# EAGLE board ADE9000 Shield (EAGLE 9.6.2)
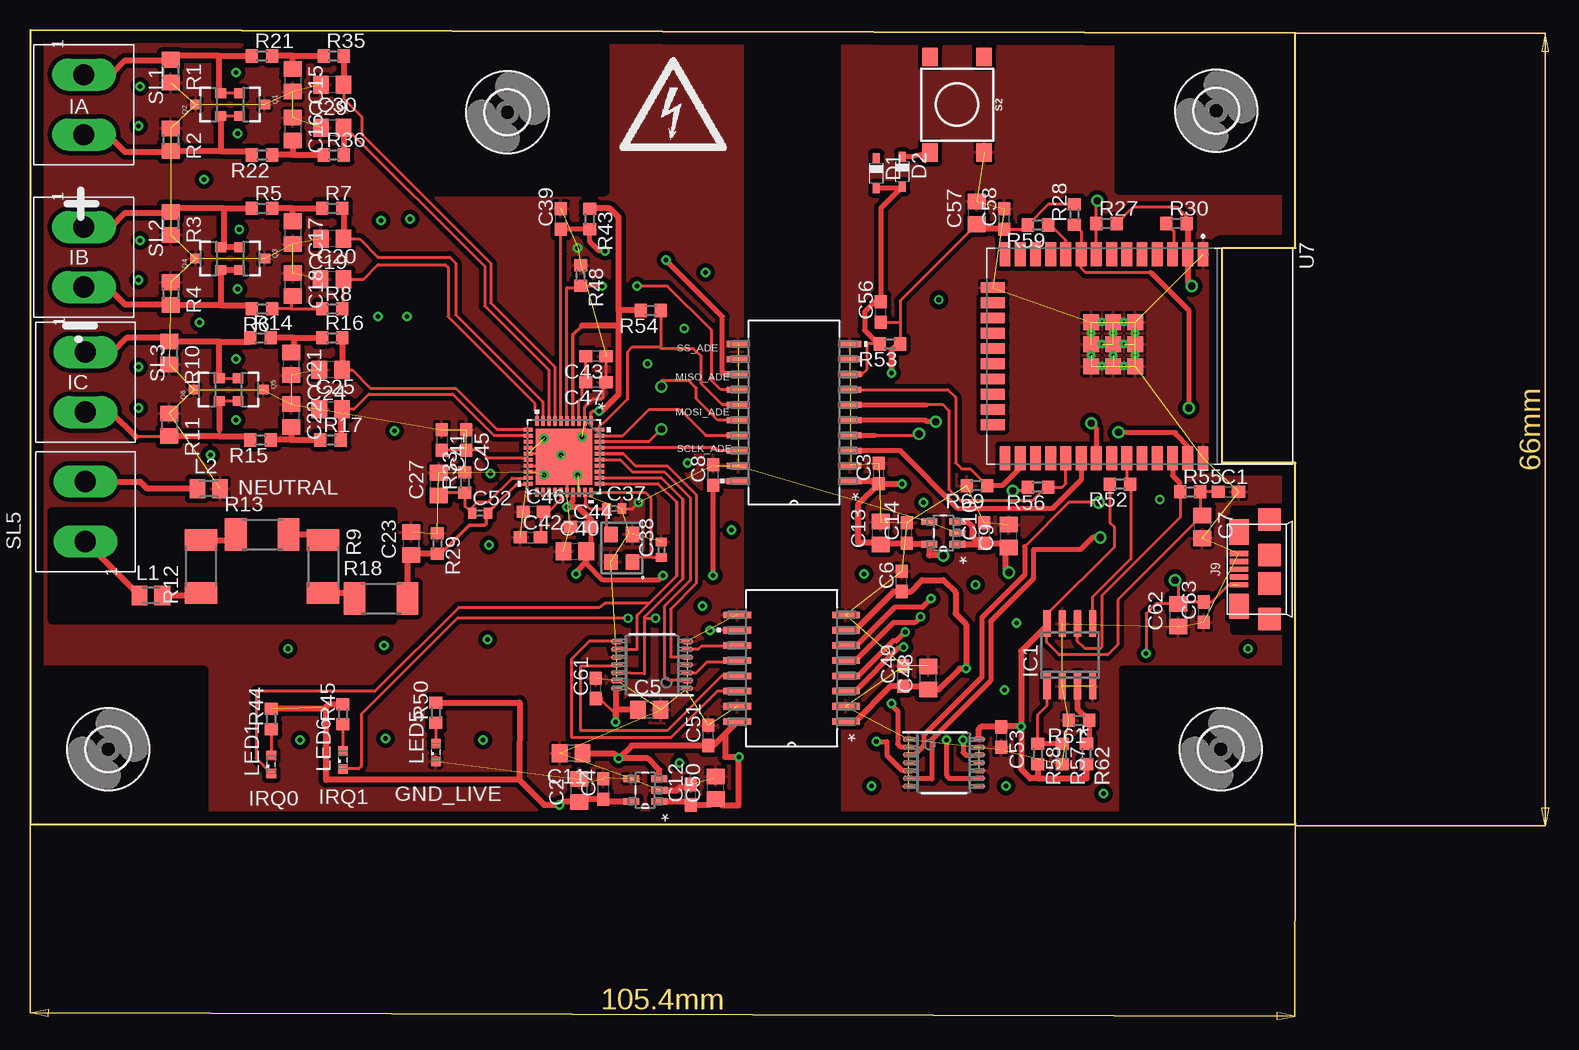
[diagram p0: board, top side]
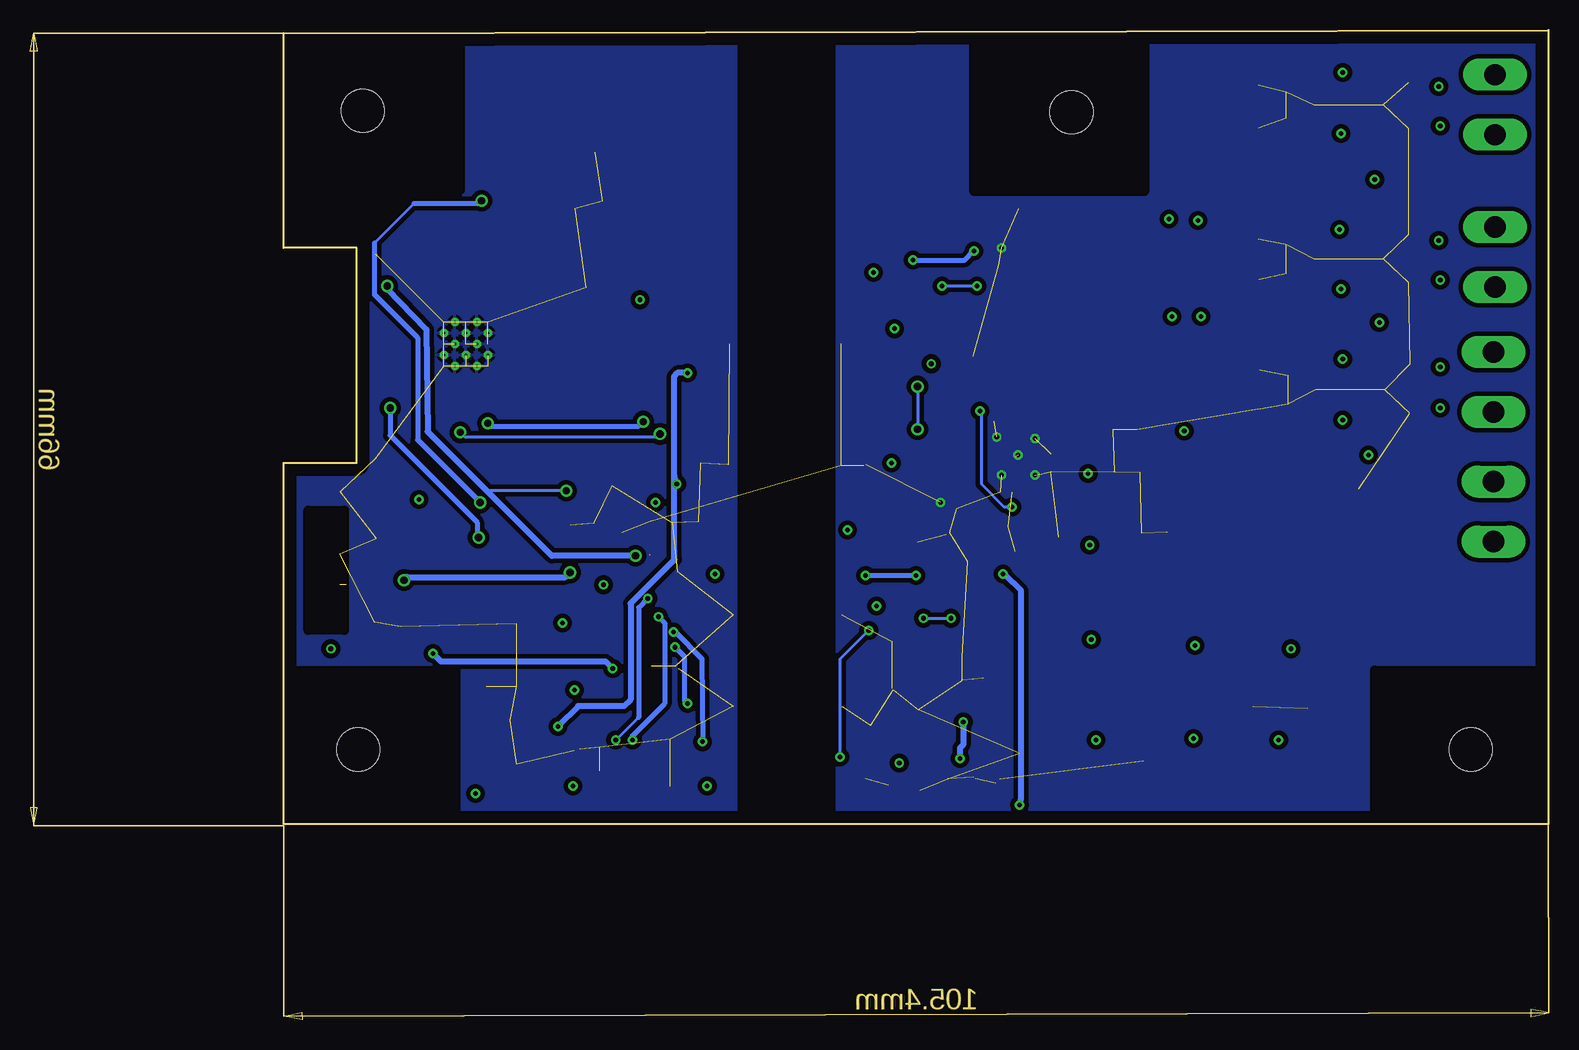
[diagram p1: board, bottom side, seen from below]

Size 105.41 x 66.17 mm. Coordinates in mm from the lower left corner, seen from the top.
Outline: 0,0 105.41,0 105.41,30.1 99.31,30.1 99.31,48.01 105.41,48.01 105.41,65.91 0,66.17 0,0
Copper layers (1*16): Top 0.035mm / dielectric 1.5mm / Bottom 0.035mm
Design rules "default": minimum track width 10mil, minimum drill 24mil, track to track 8mil, track to pad 8mil, pad to pad 8mil, via to via 8mil, smd to smd 8mil, copper to edge 40mil, drill to drill 8mil, minimum pad ring 10mil, minimum via ring 8mil, stop-mask expansion 4mil, vias tented up to drill 0mil, thermal gap 10mil
tRestrict: area 1.8,17 to 30.2,26; area 0.3,0.1 to 14.5,12.8; area 91.1,0.1 to 105.3,12.8; area 90.7,52.8 to 104.9,65.5; area 33.7,52.7 to 47.9,65.4; area 100.3,16.1 to 103.4,26.2; area 59.8,-0.1 to 67.2,66
bRestrict: area 0.3,0.1 to 14.5,12.8; area 91.1,0.1 to 105.3,12.8; area 90.7,52.8 to 104.9,65.5; area 33.7,52.7 to 47.9,65.4; area 100.3,16.1 to 103.4,26.2; area 59.8,-0.1 to 67.2,66

## Footprints (pad centres in the part's own frame; a part is rotated, then mirrored left to right if it is on the bottom)
C0603 = smd 1.1 x 1: 1 -0.85,0; 2 0.85,0
C0805 = smd 1.3 x 1.5: 1 -0.95,0; 2 0.95,0
C0402 = smd 0.7 x 0.9: 1 -0.65,0; 2 0.65,0
SOD323_ST = smd 0.8 x 0.6: A 1.25,0; C -1.25,0
3,6 = hole 3.6: 0,0
SO-08 = smd 0.6 x 2.2: 1 -1.905,-2.6; 2 -0.635,-2.6; 3 0.635,-2.6; 4 1.905,-2.6; 5 1.905,2.6; 6 0.635,2.6; 7 -0.635,2.6; 8 -1.905,2.6
USB-MICRO-10103594 = smd 0.4 x 1.6: D+ 0,0; D- -0.65,0; GND 1.3,0; ID 0.65,0; VBUS -1.3,0 | smd 1.9 x 1.9: SHLD1 -1.2,-2.55; SHLD2 1.2,-2.55; SHLD3 -4.15,-2.55; SHLD4 4.15,-2.55 | smd 2.1 x 1.6: SHLD5 3.1,0; SHLD6 -3.1,0
M0805 = smd 1.3 x 1.6: 1 -0.95,0; 2 0.95,0
SML0603 = smd 0.8 x 0.8: A 0.75,0; C -0.75,0
SOT23-3 = smd 0.8 x 0.9: 1 -0.95,-1; 2 0.95,-1; 3 0,1.1
SMD_4PIN_3.2X2.1 = smd 1.3 x 1.1: 1 -1.15,-0.9; 2 1.15,-0.9; 3 1.15,0.9; 4 -1.15,0.9
R0805 = smd 1.3 x 1.5: 1 -0.95,0; 2 0.95,0
R0603 = smd 1 x 1.1: 1 -0.85,0; 2 0.85,0
R2010 = smd 1.8 x 2.7: 1 -2.2,0; 2 2.2,0
TACTILE_SWITCH_SMD_6.2MM_TALL = smd 1.55 x 1.3: A1 -3.975,-2.25; A2 3.975,-2.25; B1 -3.975,2.25; B2 3.975,2.25
02P = drill 1.778 long: 1 -2.5,0; 2 2.5,0
CP_40_7 = smd 0.762 x 0.305: 1 -2.972,2.25; 2 -2.972,1.75; 3 -2.972,1.25; 4 -2.972,0.75; 5 -2.972,0.25; 6 -2.972,-0.25; 7 -2.972,-0.75; 8 -2.972,-1.25; 9 -2.972,-1.75; 10 -2.972,-2.25; 21 2.972,-2.25; 22 2.972,-1.75; 23 2.972,-1.25; 24 2.972,-0.75; 25 2.972,-0.25; 26 2.972,0.25; 27 2.972,0.75; 28 2.972,1.25; 29 2.972,1.75; 30 2.972,2.25 | smd 0.305 x 0.762: 11 -2.25,-2.972; 12 -1.75,-2.972; 13 -1.25,-2.972; 14 -0.75,-2.972; 15 -0.25,-2.972; 16 0.25,-2.972; 17 0.75,-2.972; 18 1.25,-2.972; 19 1.75,-2.972; 20 2.25,-2.972; 31 2.25,2.972; 32 1.75,2.972; 33 1.25,2.972; 34 0.75,2.972; 35 0.25,2.972; 36 -0.25,2.972; 37 -0.75,2.972; 38 -1.25,2.972; 39 -1.75,2.972; 40 -2.25,2.972 | smd 4.699 x 4.699: 41 0,0
RI_16_1 = smd 2.306 x 0.561: 1 -4.527,4.445; 2 -4.527,3.175; 3 -4.527,1.905; 4 -4.527,0.635; 5 -4.527,-0.635; 6 -4.527,-1.905; 7 -4.527,-3.175; 8 -4.527,-4.445; 9 4.527,-4.445; 10 4.527,-3.175; 11 4.527,-1.905; 12 4.527,-0.635; 13 4.527,0.635; 14 4.527,1.905; 15 4.527,3.175; 16 4.527,4.445
PW0014A_N = smd 0.95 x 0.45: 1 -2.95,1.95; 2 -2.95,1.3; 3 -2.95,0.65; 4 -2.95,0; 5 -2.95,-0.65; 6 -2.95,-1.3; 7 -2.95,-1.95; 8 2.95,-1.95; 9 2.95,-1.3; 10 2.95,-0.65; 11 2.95,0; 12 2.95,0.65; 13 2.95,1.3; 14 2.95,1.95
UJ_5 = smd 1.321 x 0.559: 1 -1.168,0.95; 2 -1.168,0; 3 -1.168,-0.95; 4 1.168,-0.95; 5 1.168,0.95
RI_20_1 = smd 1.921 x 0.511: 1 -4.65,5.715; 2 -4.65,4.445; 3 -4.65,3.175; 4 -4.65,1.905; 5 -4.65,0.635; 6 -4.65,-0.635; 7 -4.65,-1.905; 8 -4.65,-3.175; 9 -4.65,-4.445; 10 -4.65,-5.715; 11 4.65,-5.715; 12 4.65,-4.445; 13 4.65,-3.175; 14 4.65,-1.905; 15 4.65,-0.635; 16 4.65,0.635; 17 4.65,1.905; 18 4.65,3.175; 19 4.65,4.445; 20 4.65,5.715
MODULE_ESP32-WROOM-32 = smd 2 x 0.9: 1 -8.5,5.26; 2 -8.5,3.99; 3 -8.5,2.72; 4 -8.5,1.45; 5 -8.5,0.18; 6 -8.5,-1.09; 7 -8.5,-2.36; 8 -8.5,-3.63; 9 -8.5,-4.9; 10 -8.5,-6.17; 11 -8.5,-7.44; 12 -8.5,-8.71; 13 -8.5,-9.98; 14 -8.5,-11.25; 25 8.5,-11.25; 26 8.5,-9.98; 27 8.5,-8.71; 28 8.5,-7.44; 29 8.5,-6.17; 30 8.5,-4.9; 31 8.5,-3.63; 32 8.5,-2.36; 33 8.5,-1.09; 34 8.5,0.18; 35 8.5,1.45; 36 8.5,2.72; 37 8.5,3.99; 38 8.5,5.26 | smd 0.9 x 2: 15 -5.715,-12.25; 16 -4.445,-12.25; 17 -3.175,-12.25; 18 -1.905,-12.25; 19 -0.635,-12.25; 20 0.635,-12.25; 21 1.905,-12.25; 22 3.175,-12.25; 23 4.445,-12.25; 24 5.715,-12.25 | smd 1.33 x 1.33: 39_1 -2.835,-0.405; 39_2 -1,-0.405; 39_3 0.835,-0.405; 39_4 -2.835,-2.24; 39_5 -1,-2.24; 39_6 0.835,-2.24; 39_7 -2.835,-4.075; 39_8 -1,-4.075; 39_9 0.835,-4.075 | drill 0.2 pad 0.3: 39_10 -1.917,-0.405; 39_11 -0.083,-0.405; 39_12 -2.835,-1.323; 39_13 -1,-1.323; 39_14 0.835,-1.323; 39_15 -1.917,-2.24; 39_16 -0.083,-2.24; 39_17 -2.835,-3.158; 39_18 -1,-3.158; 39_19 0.835,-3.158; 39_20 -1.917,-4.075; 39_21 -0.083,-4.075

## Placement (x,y rotation side)
C1  0.1u  [C0603]  99.82,27.69 0 top
C2  10u  [C0805]  45.72,2.79 90 top
C3  0.1u  [C0603]  70.69,29.21 90 top
C4  0.1u  [C0603]  47.75,2.92 90 top
C5  4.7u  [C0805]  51.56,9.52 0 top
C6  0.1u  [C0603]  72.59,20.22 90 top
C7  4.7u  [C0805]  97.66,24.77 270 top
C8  0.1u  [C0603]  56.9,29.08 90 top
C9  10u  [C0805]  81.53,24 90 top
C10  0.1u  [C0603]  79.5,24.26 90 top
C11  10u  [C0805]  45.06,5.89 180 top
C12  0.1u  [C0603]  55.02,2.44 90 top
C13  10u  [C0805]  70.87,24.26 90 top
C14  0.1u  [C0603]  73.03,24.26 90 top
C15  DNP  [C0805]  21.84,61.98 270 top
C16  DNP  [C0805]  21.84,57.91 270 top
C17  DNP  [C0805]  21.84,49.28 270 top
C18  DNP  [C0805]  21.84,44.96 270 top
C19  0.022u  [C0805]  25.15,48.77 180 top
C20  0.022u  [C0805]  25.12,45.42 0 top
C21  DNP  [C0805]  21.72,38.35 270 top
C22  DNP  [C0805]  21.72,34.04 270 top
C23  0.022u  [C0805]  31.75,23.37 90 top
C24  0.022u  [C0805]  25.02,37.85 180 top
C25  0.022u  [C0805]  25.02,34.54 0 top
C27  0.022u  [C0805]  34.04,28.32 90 top
C29  0.022u  [C0805]  25.15,61.59 180 top
C30  0.022u  [C0805]  25.15,58.04 0 top
C37  18p  [C0402]  48.64,26.29 0 top
C38  18p  [C0402]  52.58,22.86 90 top
C39  1u  [C0603]  44.2,50.42 90 top
C40  4.7u  [C0805]  45.36,22.73 0 top
C41  4.7u  [C0603]  34.29,32 270 top
C42  4.7u  [C0603]  41.66,23.88 0 top
C43  4.7u  [C0603]  47.12,38.99 180 top
C44  0.1u  [C0603]  45.85,24.77 0 top
C45  0.1u  [C0603]  36.32,32 270 top
C46  0.1u  [C0603]  41.91,26.04 0 top
C47  0.1u  [C0603]  47.12,36.83 180 top
C48  10u  [C0805]  74.8,12.17 90 top
C49  0.1u  [C0603]  72.72,12.32 90 top
C50  10u  [C0805]  57.1,3.02 90 top
C51  0.1u  [C0603]  56.49,7.39 90 top
C52  51p  [C0402]  37.46,25.91 0 top
C53  0.1u  [C0603]  80.9,7.24 270 top
C56  1u  [C0603]  70.87,42.67 90 top
C57  10u  [C0805]  78.87,50.93 90 top
C58  0.1u  [C0603]  81.15,50.42 90 top
C61  0.1u  [C0603]  47.12,11.3 90 top
C62  22u  [C0805]  95.63,17.4 90 top
C63  0.1u  [C0603]  97.79,17.65 90 top
D1  BAT54WS  [SOD323_ST]  70.48,54.23 270 top
D2  BAT54WS  [SOD323_ST]  72.64,54.36 270 top
DRILEGEND  [DRILEGEND]  12.19,-38.21 0 top  (outside the outline)
H1  MOUNT-HOLE3.6  [3,6]  6.48,6.22 0 top
H2  MOUNT-HOLE3.6  [3,6]  39.75,59.31 0 top
H3  MOUNT-HOLE3.6  [3,6]  98.81,59.44 0 top
H4  MOUNT-HOLE3.6  [3,6]  99.19,6.22 0 top
IC1  24LC32A/SN  [SO-08]  86.61,14.1 0 top
J9  ZX62-AB-5PA(31)  [USB-MICRO-10103594]  100.71,21.23 90 top
L1  1500  [M0805]  10.03,19.05 0 top
L2  1500  [M0805]  14.86,27.94 0 top
LED1  APT1608LSECK/J3-PRV  [SML0603]  20.07,4.95 90 top
LED5  APT1608LZGCK  [SML0603]  33.78,5.97 90 top
LED6  APT1608LSECK/J3-PRV  [SML0603]  26.03,5.33 90 top
Q1  MMBD4148SE  [SOT23-3]  18.41,59.94 270 top
Q2  MMBD4148SE  [SOT23-3]  14.86,59.94 90 top
Q3  MMBD4148SE  [SOT23-3]  18.41,47.12 270 top
Q4  MMBD4148SE  [SOT23-3]  14.86,47.12 90 top
Q5  MMBD4148SE  [SOT23-3]  18.29,36.2 270 top
Q6  MMBD4148SE  [SOT23-3]  14.73,36.2 90 top
Q8  ECS-245.7-12-33Q-JES-TR  [SMD_4PIN_3.2X2.1]  49.28,22.99 90 top
R1  5.1  [R0805]  11.68,62.74 270 top
R2  5.1  [R0805]  11.68,57.02 270 top
R3  5.1  [R0805]  11.68,50.04 270 top
R4  5.1  [R0805]  11.68,44.2 270 top
R5  0  [R0603]  19.3,51.31 0 top
R6  0  [R0603]  19.3,42.93 180 top
R7  1k  [R0603]  25.15,51.31 0 top
R8  1k  [R0603]  25.15,42.93 0 top
R9  200k  [R2010]  24.38,21.46 270 top
R10  5.1  [R0805]  11.56,39.24 270 top
R11  5.1  [R0805]  11.56,33.27 270 top
R12  200k  [R2010]  14.22,21.46 90 top
R13  200k  [R2010]  19.3,24.13 0 top
R14  0  [R0603]  19.18,40.51 0 top
R15  0  [R0603]  19.18,32 180 top
R16  1k  [R0603]  25.15,40.51 0 top
R17  1k  [R0603]  25.02,32 0 top
R18  200k  [R2010]  29.21,18.8 0 top
R21  0  [R0603]  19.3,64.01 0 top
R22  0  [R0603]  19.3,55.75 180 top
R27  10k  [R0603]  89.66,50.04 0 top
R28  10k  [R0603]  87,50.8 90 top
R29  1k  [R0603]  33.91,23.37 270 top
R30  10k  [R0603]  95.5,50.04 0 top
R33  1k  [R0603]  36.2,28.45 90 top
R35  1k  [R0603]  25.27,64.01 0 top
R36  1k  [R0603]  25.27,55.75 0 top
R43  10k  [R0603]  46.61,50.42 270 top
R44  3k  [R0603]  20.07,8.76 90 top
R45  3k  [R0603]  26.03,9.14 90 top
R48  10k  [R0603]  45.85,45.72 270 top
R50  3k  [R0603]  33.78,9.27 90 top
R52  10k  [R0603]  90.81,28.32 180 top
R53  10k  [R0603]  71.63,40 180 top
R54  10k  [R0603]  51.69,42.8 180 top
R55  10k  [R0603]  96.65,27.69 0 top
R56  10k  [R0603]  83.95,28.07 180 top
R57  0  [R0603]  85.98,5.84 270 top
R58  DNP  [R0603]  83.95,5.84 270 top
R59  10k  [R0603]  83.95,49.91 180 top
R61  DNP  [R0603]  87.38,8.64 180 top
R62  0  [R0603]  88.01,5.84 270 top
R69  10k  [R0603]  78.87,28.19 180 top
S2  PTS645SM43SMTR92  [TACTILE_SWITCH_SMD_6.2MM_TALL]  77.22,59.94 270 top
SL1  25.161.0253.0  [02P]  4.45,59.94 270 top
SL2  25.161.0253.0  [02P]  4.45,47.24 270 top
SL3  25.161.0253.0  [02P]  4.57,36.83 270 top
SL5  25.161.0253.0  [02P]  4.57,26.04 90 top
U1  ADE9000ACPZ  [CP_40_7]  44.45,30.61 270 top
U2  ADUM6404ARIZ  [RI_16_1]  63.42,12.98 180 top
U3  SN74LV4T125PWR  [PW0014A_N]  51.79,13.26 180 top
U4  ADP122AUJZ-3.3-R7  [UJ_5]  51.23,2.82 180 top
U5  ADUM4151BRIZ  [RI_20_1]  63.63,34.29 180 top
U6  SN74LV4T125PWR  [PW0014A_N]  76.12,5.11 0 top
U7  ESP32-WROOM-32  [MODULE_ESP32-WROOM-32]  92.46,38.99 270 top
U8  ADP122AUJZ-3.3-R7  [UJ_5]  76.07,24.26 180 top

## Library data of the parts
C1-C14 C48-C51 C53 C57 C58 C61-C63 = eagle-ltspice; SPICEMODEL: NONE; SPICEPREFIX: C
C15-C25 C27 C29 C30 C37-C47 C52 C56 = capacitors; SPICEMODEL: NONE; SPICEPREFIX: C
D1 D2 = diode; DIGIKEY: BAT54WS-FDITR-ND
DRILEGEND = drilegend
H1-H4 = holes
IC1 = microchip; DIGIKEY: 24LC32A/SN-ND; MF: MICROCHIP; MPN: 24LC32A/SN; OC_FARNELL: 9758003; OC_NEWARK: 33C2976
J9 = Connectors; MANUFACTURER: Hirose Electric; MFRPART#: ZX62-AB-5PA(31)
L1 L2 = Inductors; DIGIKEY: 490-1048-1-ND
LED1 LED6 = DIODE_LED; DIGIKEY: 754-1930-1-ND; PARTNO: APT1608LSECK/J3-PRV
LED5 = DIODE_LED; DIGIKEY: 754-1934-1-ND; PARTNO: APT1608LZGCK
Q1-Q6 = DIODE_LED; DIGIKEY: MMBD4148SECT-ND
Q8 = Crystals; DIGIKEY: XC2178CT-ND
R1 = eagle-ltspice; DESCRIPTION: RES, 5.1, 0W1, 0%1, 0805-SMT, ROHS; MANUFACTURER: TE Connectivity Passive Product; MFR_PART_NO_#: CPF0805B5R1E1; SPICEMODEL: NONE; SPICEPREFIX: R
R2-R18 R21 R22 R27-R30 R33 R35 R36 R43-R45 R48 R50 R52-R59 R61 R62 R69 = eagle-ltspice; SPICEMODEL: NONE; SPICEPREFIX: R
S2 = SparkFun-Switches; DIGIKEY: CKN9112TR-ND; PROD_ID: SWCH-11966; SF_SKU: COM-12992
SL1-SL3 SL5 = GEEC_LibrariesCon_GEEC_Voltage; OC_FARNELL: unknown; OC_NEWARK: unknown
U1 = IC; DIGIKEY: ADE9000ACPZ-RLCT-ND
U2 = IC; DIGIKEY: ADUM6404ARIZ-ND
U3 U6 = IC; COMPTYPE: IC; DIGIKEY: 296-40545-1-ND; MANUFACTURER: Texas Instruments; MOUNTTYPE: SMT; PACKAGEREFERENCE: PW0014A; PARTNUMBER: SN74LV4T125PWR; PIN_COUNT: 14; REFDES: RefDes; ROHS: Y; TYPE: TYPE
U4 = IC; DIGIKEY: ADP122AUJZ-3.3-R7CT-ND
U5 = IC; DIGIKEY: ADUM4151BRIZ-ND
U7 = ESP32-WROOM-32; AVAILABILITY: In Stock; CHECK_PRICES: https://www.snapeda.com/parts/ESP32-WROOM-32/Espressif+Systems/view-part/?ref=eda; DESCRIPTION: Bluetooth, WiFi 802.11b/g/n, Bluetooth v4.2 +EDR, Class 1, 2 and 3 Transceiver Module 2.4GHz ~ 2.5GHz Antenna Not Included, U.FL Surface Mount; MF: Espressif Systems; MP: ESP32-WROOM-32; PACKAGE: None; PRICE: None; PURCHASE-URL: https://www.snapeda.com/api/url_track_click_mouser/?unipart_id=2753322&manufacturer=Espressif Systems&part_name=ESP32-WROOM-32&search_term=None; SNAPEDA_LINK: https://www.snapeda.com/parts/ESP32-WROOM-32/Espressif+Systems/view-part/?ref=snap
U8 = IC

## Nets
5V_ADE: C5.1 C11.1 C12.1 C50.1 C51.1 C61.1 U2.10 U2.16 U3.14 U4.1 U4.3
+3V3: C2.1 C4.1 C8.1 C40.2 C44.2 R43.1 R44.2 R45.2 R50.2 R54.2 U1.1 U1.4 U1.27 U4.5 U5.20
AVDDOUT: C42.2 C46.2 U1.25
CF1_ISO: U1.33
CF2_ISO: U1.34
DREADY_ADE: U1.36 U3.5
DREADY_ISO: U6.11
DVDDOUT: C43.2 C47.2 U1.3
GND: C2.2 C4.2 C5.2 C8.2 C11.2 C12.2 C15.2 C16.1 C17.2 C18.1 C19.2 C20.1 C21.2 C22.1 C23.2 C24.2 C25.1 C27.2 C29.2 C30.1 C37.2 C38.2 C39.2 C40.1 C41.1 C42.1 C43.1 C44.1 C45.1 C46.1 C47.1 C50.2 C51.2 C61.2 L2.2 LED5.C Q1.3 Q2.3 Q3.3 Q4.3 Q5.3 Q6.3 Q8.2 Q8.4 R1.2 R2.1 R3.2 R4.1 R10.2 R11.1 R29.1 R33.2 R48.1 U1.2 U1.15 U1.17 U1.18 U1.26 U1.28 U1.41 U2.9 U2.15 U3.1 U3.4 U3.7 U3.10 U3.13 U4.2 U4.4 U5.11 U5.12 U5.19 U8.2 U8.4
GNDA: C1.2 C3.2 C6.2 C7.2 C9.2 C10.2 C13.2 C14.2 C48.2 C49.2 C53.2 C57.2 C58.2 C62.1 C63.1 IC1.2 IC1.4 IC1.7 J9.GND R57.2 R61.2 R69.2 S2.B2 U2.2 U2.8 U5.2 U5.10 U6.1 U6.4 U6.7 U6.10 U6.13 U7.1 U7.15 U7.38 U7.39_1 U7.39_2 U7.39_3 U7.39_4 U7.39_5 U7.39_6 U7.39_7 U7.39_8 U7.39_9 U7.39_10 U7.39_11 U7.39_12 U7.39_13 U7.39_14 U7.39_15 U7.39_16 U7.39_17 U7.39_18 U7.39_19 U7.39_20 U7.39_21
IAN: C30.2 R36.2 U1.8
IAP: C29.1 R35.2 U1.7
IBN: C20.2 R8.2 U1.10
IBP: C19.1 R7.2 U1.9
ICN: C25.2 R17.2 U1.12
ICP: C24.1 R16.2 U1.11
INN: U1.14
INP: U1.13
IRQ0_ADE: LED1.C U1.31 U3.9
IRQ0_ISO: R27.1 U6.3 U7.8
IRQ1_ADE: LED6.C U1.32 U3.12
IRQ1_ISO: R28.1 U6.6 U7.9
MISO_ADE: U1.38 U5.16
MISO_ISO: U5.5 U7.31
MOSI_ADE: U1.39 U5.17
MOSI_ISO: U5.4 U7.37
N$1: C37.1 Q8.3 U1.29
N$2: C38.1 Q8.1 U1.30
N$3: Q3.1 Q4.2 R3.1 R5.1 SL2.1
N$4: Q3.2 Q4.1 R4.2 R6.2 SL2.2
N$6: C18.2 R6.1 R8.1
N$7: Q1.1 Q2.2 R1.1 R21.1 SL1.1
N$8: IC1.3 R61.1 R62.1
N$9: C17.1 R5.2 R7.1
N$10: R30.1 U7.3
N$11: Q5.1 Q6.2 R10.1 R14.1 SL3.1
N$13: Q5.2 Q6.1 R11.2 R15.2 SL3.2
N$14: C16.2 R22.1 R36.1
N$15: L2.1 SL5.2
N$17: C22.2 R15.1 R17.1
N$18: C21.1 R14.2 R16.1
N$27: LED1.A R44.1
N$28: LED6.A R45.1
N$30: U2.14 U3.8
N$31: U2.13 U3.11
N$35: L1.2 R12.1
N$36: R12.2 R13.1
N$37: R9.1 R13.2
N$38: R9.2 R18.1
N$39: D2.C S2.A2
N$40: Q1.2 Q2.1 R2.2 R22.2 SL1.2
N$41: C15.1 R21.2 R35.1
N$44: U2.12 U3.3
N$49: U2.11 U3.6
N$50: LED5.A R50.1
N$57: U2.3 U6.2
N$58: U2.4 U6.5
N$59: U2.5 U6.9
N$60: U2.6 U6.12
N$67: L1.1 SL5.1
N$76: IC1.1 R57.1 R58.1
PM1_ADE: R48.2 U1.5 U5.14
PM1_ISO: R69.1 U5.7 U7.26
REF: C41.2 C45.2 U1.16
RESET_ADE: C39.1 R43.2 U1.6 U5.13
RESET_ARD: D1.C
RESET_ESP: R59.1 U7.10
RESET_ISO: C56.2 D1.A D2.A R53.2 U5.8
SCL_ARDUINO: IC1.6 R55.1 U7.36
SCLK_ADE: U1.37 U5.18
SCLK_ISO: U5.3 U7.30
SDA_ARDUINO: IC1.5 R52.1 U7.33
SS_ADE: R54.1 U1.40 U5.15
SS_ISO: R56.1 U5.6 U7.29
V+: C1.1 C3.1 C7.1 C13.1 C14.1 C53.1 C56.1 C57.1 C58.1 IC1.8 R27.2 R28.2 R30.2 R52.2 R53.1 R55.2 R56.2 R58.2 R59.2 R62.2 U5.1 U6.14 U7.2 U8.5
VAN: C27.1 C52.1 R33.1 U1.19
VAP: C23.1 C52.2 R18.2 R29.2 U1.20
VCC: C6.1 C9.1 C10.1 C48.1 C49.1 C62.2 C63.2 J9.VBUS U2.1 U2.7 U8.1 U8.3
ZX_ADE: U1.35 U3.2
ZX_ISO: U6.8

## Tracks (layer width: path | path; a pad name or v marks a point on that pad's centre or on a via)
5V_ADE  (via drill 0.38)
  Top 0.254: v56.64,16.13 56.42,16.13 56.39,16.15 U2.10 | 47.46,10.45 48.77,9.14 | 59.02,5.59 v59.05,5.59
  Top 0.508: C51.1 56.39,6.31 | U4.1 54.73,1.87 C12.1 56.61,1.59 C50.1 57.65,1.52 59.02,1.52 59.02,5.59 57.88,5.59 57.88,7.52 U2.16 56.9,6.54 C51.1 | 52.54,3.77 U4.3 52.4,4.5 51.43,5.46 v49.02,5.46 | v48.77,8.51 48.77,9.14 48.77,9.52 | U3.14 48.77,11.24 48.77,9.52 | C61.1 47.46,10.45 | C5.1 48.77,9.52 | v49.02,5.46 50.1,6.54 C51.1 | C11.1 48.59,5.89 v49.02,5.46
  Bottom 0.254: v59.05,5.59 59.05,13.72 v56.64,16.13
  Bottom 0.508: v49.02,5.46 49.02,6.35 48.77,6.6 v48.77,8.51
+3V3  (via drill 0.38)  (1 unrouted)
  Top 0.254: 46.65,51.31 R43.1 | 49.02,41.53 48.92,41.53 49.02,41.43 | 57.24,28.58 C8.1 | v47.37,34.42 47.62,34.42
  Top 0.305: 46.74,23.73 46.74,24.73 C44.2 | 45.97,41.53 45.2,40.75 U1.4 | 46.31,21.72 C40.2 | U1.1 46.7,34.25 46.86,34.42 v47.37,34.42
  Top 0.381: 47.75,2 C4.1
  Top 0.406: C44.2 46.7,23.11 C40.2 46.31,21.84 | v52.7,20.7 52.32,20.32 47.71,20.32 46.31,21.72 | v56.9,20.7 C8.1 | U5.20 57.24,28.58 | U1.27 45.2,26.91 v44.7,26.42
  Top 0.508: 46.65,51.31 48.26,51.31 49.02,50.55 49.02,42.8 | 49.02,42.8 49.02,41.53 | 48.92,41.53 45.97,41.53 | U4.5 47.75,1.87 C4.1 45.95,2.07 C2.1 44.33,1.84 v44.08,1.59 42.81,1.59 40.72,3.68 40.71,3.68 | v45.47,20.83 45.47,21 46.31,21.84 | R54.2 49.02,42.8 | 47.62,34.42 49.02,35.81 49.02,41.43 | 24.64,9.78 24.85,9.99 R45.2 | R44.2 24.64,9.61 24.64,3.68 40.71,3.68 | C44.2 46.7,25.38 45.66,26.42 v44.7,26.42 | R50.2 40.77,10.12 40.71,3.68
  Bottom 0.254: v44.7,26.42 45.34,26.42 47.24,28.32 47.24,34.04 v47.37,34.42
  Bottom 0.406: v52.7,20.7 v56.9,20.7
  Bottom 0.508: v45.47,20.83 45.34,20.83 43.94,19.43 43.94,2.16 43.95,2.15 v44.08,1.59
AVDDOUT
  Top 0.254: U1.25 44.2,27.05 43.18,26.04 C46.2 42.51,25.78 C42.2
DREADY_ADE
  Top 0.254: 54.42,13.91 U3.5 53.34,13.91 53.34,17.91 55.5,20.07 55.5,27.43 53.09,29.85 50.42,29.85 49.41,30.86
  Top 0.305: U1.36 49.41,30.86
DVDDOUT
  Top 0.254: U1.3 45.7,35.29 45.97,35.56 45.97,36.54 C47.2 C43.2
GND  (via drill 0.38)  (70 unrouted)
  Top 0.254: U1.41 46.23,32.38 46.23,32.64 46.1,32.64 46.2,32.74 U1.2 46.2,34.77 46.86,35.43 47.62,35.43 47.75,35.56 47.75,36.61 C47.1 C43.1 | U1.28 45.7,29.36 U1.41 | U1.26 44.7,30.36 U1.41 | U1.18 43.2,29.36 U1.41 | U1.41 43.7,29.86 U1.17 41.47,29.85 | U1.15 44.2,30.86 U1.41 | 49.91,24.26 49.91,24.51 Q8.2 | C37.2 50.16,26.29 v50.67,26.8 | U3.1 54.61,11.18 | 57.06,29.85 C8.2 | C20.1 24.13,45.41 | C24.2 24.17,37.85 | C25.1 24.17,34.54 | 31.75,24.22 C23.2
  Top 0.508: 56.53,8.15 C51.2 | 47.88,3.9 C4.2 | 46.07,3.39 C2.2 | U4.2 53.87,2.82 54.1,3.05 54.78,3.05 C12.2 | 56.92,3.8 C50.2
  other vias: 42.8,32.13 45.97,32.26 45.59,29.08 42.8,29.08 44.2,30.73 45.59,48.01
  pour Top (isolate 0.381): 0,65.91 59.82,65.91 59.82,0 0,0
  pour Bottom (isolate 0.381): 59.82,65.91 0,65.91 0,0 59.82,0
GND2  (via drill 0.38)
  other vias: 9.14,61.47
GND3  (via drill 0.38)
  other vias: 9.02,58.17
GND4  (via drill 0.38)
  other vias: 9.14,48.64
GND5  (via drill 0.38)
  other vias: 9.02,45.34
GND6  (via drill 0.38)
  other vias: 9.02,38.1
GND7  (via drill 0.38)
  other vias: 9.02,34.67
GND8  (via drill 0.38)
  other vias: 14.1,41.78
GND9  (via drill 0.38)
  other vias: 17.15,38.73
GND10  (via drill 0.38)
  other vias: 17.15,33.65
GND11  (via drill 0.38)
  other vias: 17.4,49.53
GND12  (via drill 0.38)
  other vias: 17.27,44.58
GND13  (via drill 0.38)
  other vias: 17.27,57.53
GND14  (via drill 0.38)
  other vias: 17.15,62.61
GND15  (via drill 0.38)
  other vias: 14.48,53.72
GND16  (via drill 0.38)
  other vias: 29.21,50.29
GND17  (via drill 0.38)
  other vias: 31.62,50.42
GND18  (via drill 0.38)
  other vias: 28.96,42.29
GND19  (via drill 0.38)
  other vias: 31.37,42.29
GND20  (via drill 0.38)
  other vias: 38.35,29.21
GND21  (via drill 0.38)
  other vias: 30.35,32.77
GND22  (via drill 0.38)
  other vias: 38.23,23.24
GND23  (via drill 0.38)
  other vias: 38.1,15.37
GND24  (via drill 0.38)
  other vias: 29.46,14.86
GND25  (via drill 0.38)
  other vias: 21.46,14.6
GND26  (via drill 0.38)
  other vias: 22.48,6.99
GND27  (via drill 0.38)
  other vias: 78.74,19.94
GND28  (via drill 0.38)
  other vias: 37.72,6.99
GND29  (via drill 0.38)
  other vias: 29.59,7.11
GND30  (via drill 0.38)
  other vias: 81.15,11.18
GND31  (via drill 0.38)
  other vias: 101.47,14.6
GND32  (via drill 0.38)
  other vias: 94.11,27.05
GND35  (via drill 0.38)
  other vias: 75.69,43.69
GND36  (via drill 0.38)
  other vias: 69.47,20.83
GND37  (via drill 0.38)
  other vias: 70.1,3.17
GND38  (via drill 0.38)
  other vias: 81.28,3.17
GND39  (via drill 0.38)
  other vias: 82.17,16.76
GND40  (via drill 0.38)
  other vias: 89.41,2.54
GND41  (via drill 0.38)
  other vias: 74.42,26.8
GND42  (via drill 0.38)
  other vias: 54.48,41.27
GND43  (via drill 0.38)
  other vias: 51.43,38.35
GND44  (via drill 0.38)
  other vias: 54.74,30.1
GND45  (via drill 0.38)
  other vias: 56.26,45.97
GND46  (via drill 0.38)
  other vias: 58.42,24.51
GND47  (via drill 0.38)
  other vias: 54.1,5.08
GND48  (via drill 0.38)
  other vias: 56.01,18.16
GND49  (via drill 0.38)
  other vias: 14.99,30.73
GNDA  (55 unrouted)
  Top 0.254: 80.73,6.22 C53.2 | 79.07,6.38 U6.13
  Top 0.508: 68.37,29.93 U5.2 | 74.75,13.17 C48.2 | 81.19,6.1 C53.2 | 72.53,12.98 C49.2
  pour Bottom (isolate 0.381): 67.44,0 67.44,65.91 105.41,65.91 105.41,48.01 99.33,48.01 99.33,30.1 105.41,30.1 105.45,0
  pour Top (isolate 0.381): 105.46,65.91 67.44,65.91 67.44,0 105.41,0 105.41,30.1 99.33,30.1 99.33,48.01 105.44,48.01
IAN
  Top 0.254: U1.8 43.18,33.6 43.18,37.85 37.85,43.18 37.85,46.48 26.29,58.04 C30.2 26.12,58.04
  Top 0.508: 26.12,58.04 R36.2
IAP
  Top 0.254: C29.1 26.1,60.45 27.62,58.93 27.62,57.47 38.35,46.74 38.35,43.43 43.69,38.1 U1.7 | R35.2 26.1,64.01
  Top 0.508: 26.1,64.01 C29.1
IBN
  Top 0.254: U1.10 42.19,34.29 42.04,34.44 42.04,35.05 34.8,42.29 34.8,46.35 34.54,46.61 28.96,46.61 27.76,45.41 C20.2 26.07,42.93 R8.2 25.97,43.33
IBP
  Top 0.254: U1.9 42.67,33.61 42.67,35.18 35.43,42.42 35.43,46.74 34.92,47.24 28.96,47.24 27.43,48.77 C19.1 | R7.2 26.1,51.31
  Top 0.508: 26.1,51.31 C19.1
ICN
  Top 0.254: U1.12 41.45,32.38 38.61,32.38 35.18,35.81 28.19,35.81 26.92,34.54 C25.2 25.87,34.54
  Top 0.508: 25.87,34.54 R17.2
ICP
  Top 0.254: C24.1 26.8,37.85 28.32,36.32 35.43,36.32 38.86,32.89 41.44,32.89 U1.11 | R16.2 25.97,40.51
  Top 0.508: 25.97,40.51 C24.1
IRQ0_ADE
  Top 0.254: U1.31 52.29,28.36 53.85,26.8 | U3.9 50.55,14.56 50.55,17.4 51.56,18.42 | 51.56,18.42 53.85,20.7 | 51.56,18.42 47.87,18.42 47.37,18.03 35.69,18.03 28.71,11.05 18.8,11.05 18.8,5.47 LED1.C | LED1.C 20.08,4.19 | 19.8,3.94 LED1.C
  Top 0.305: 53.85,20.7 53.85,26.8
IRQ0_ISO  (via drill 0.61)
  Top 0.254: U6.3 73.68,5.75 | U7.8 88.83,49.92 88.94,50.04 | R27.1 88.81,51.85 v88.9,51.94 | v89.03,26.8 86.53,26.8 82.84,23.11
  Top 0.406: 88.94,50.04 R27.1 | 82.84,23.11 82.84,20.76 79.28,17.2 79.28,12.24 74.44,7.41 74.44,6.52 73.68,5.75
  Bottom 0.254: 97.82,48.42 94.52,51.72
  Bottom 0.406: v89.03,26.8 94.23,32 94.23,40.51 97.82,44.1 97.82,48.42 | 94.52,51.72 89.12,51.72 v88.9,51.94
IRQ1_ADE  (via drill 0.38)
  Top 0.254: U1.32 52.55,28.86 54.36,27.05 | U3.12 51.18,12.5 51.18,17.14 | 51.18,17.14 51.18,17.27 54.36,20.45 | 51.18,17.14 v52.07,17.14 | v49.78,17.14 35.56,17.14 27.56,9.14 27.56,4.83 27.32,4.58 LED6.C | LED6.C | 25.77,4.32 LED6.C
  Top 0.305: 54.36,20.45 54.36,27.05
  Bottom 0.254: v52.07,17.14 v49.78,17.14
IRQ1_ISO  (via drill 0.61)
  Top 0.254: 87.57,47.34 87.56,47.36 U7.9 | R28.1 87.56,49.39 U7.9 | U7.9 87.54,47.47 87.54,46.35 87.92,45.97 93.36,45.97
  Top 0.406: U6.6 73.22,3.76 75.14,3.76 75.14,7.08 80.01,11.95 80.01,16.89 83.57,20.45 83.57,22.86 87.5,22.86 88.52,23.88 v89.15,23.88 | 93.36,45.97 96.52,42.81 v96.52,34.67
  Bottom 0.406: v96.52,34.67 96.52,32.38 89.28,25.15 89.28,23.75 v89.15,23.88
MISO_ADE  (via drill 0.61)
  Top 0.254: U5.16 57.28,33.65 55.5,35.43 55.5,36.32 54.86,36.96 52.58,36.96 v52.58,36.45 | v52.58,32.89 51.54,31.86 U1.38
  Bottom 0.254: v52.58,36.45 v52.58,32.89
MISO_ISO  (via drill 0.61)
  Top 0.406: v88.39,33.4 88.83,32.97 U7.31 | U5.5 74.55,33.65 74.68,33.53 v75.44,33.53
  Bottom 0.254: v88.39,33.4 88.14,33.15
  Bottom 0.406: 88.14,33.15 75.82,33.15 v75.44,33.53
MOSI_ADE
  Top 0.254: U5.17 56.26,32.38 54.1,34.54 51.56,34.54 49.38,32.36 U1.39
MOSI_ISO  (via drill 0.61)
  Top 0.254: 96.45,31.44 U7.37 | 95.42,32.64 95.42,32.47 | 70.36,32.38 73.91,32.38 v74.04,32.51
  Top 0.406: U5.4 70.36,32.38 | v90.68,32.64 95.42,32.64 | 95.42,32.47 96.45,31.44
  Bottom 0.254: v90.68,32.64 90.3,32.26 74.3,32.26 v74.04,32.51
N$1
  Top 0.254: U1.29 46.23,27.61 46.23,26.67 46.61,26.29 C37.1 47.99,24.52 Q8.3
N$2
  Top 0.254: U1.30 51.23,27.64 51.69,27.18 51.69,22.34 51.82,22.21 | 51.82,22.21 C38.1 | 51.82,22.21 50.55,22.21 Q8.1
N$3
  Top 0.254: 11.36,50.93 R3.1 11.68,51.31 | Q4.2 16.13,48.07
  Top 0.508: SL2.1 6.69,49.74 7.87,50.93 11.36,50.93 | 16.13,51.31 R5.1 | 16.13,51.31 11.68,51.31 | 16.13,48.07 16.13,51.31 | Q3.1 Q4.2
N$4
  Top 0.254: 11.36,43.31 R4.2 | Q4.1 15.87,46.17 | 15.87,43.81 15.87,43.63 | 18.45,43.25 R6.2
  Top 0.508: SL2.2 6.44,44.74 7.87,43.31 11.36,43.31 | Q3.2 Q4.1 | 15.87,46.17 15.87,43.81 15.87,43.25 | 15.87,43.25 R4.2 | 15.87,43.25 18.45,43.25
N$6
  Top 0.254: 21.72,42.93 R6.1 | 21.72,42.93 R8.1 | C18.2 21.72,44.01 21.72,42.93
N$7
  Top 0.254: 11.36,63.63 R1.1 11.68,64.01 | Q1.1 Q2.2 15.75,60.89
  Top 0.508: SL1.1 6.69,62.44 7.87,63.63 11.36,63.63 | 15.75,64.01 R21.1 | 15.75,64.01 11.68,64.01 | 15.75,60.89 15.75,64.01
N$8
  Top 0.254: IC1.3 87.38,11.37
  Top 0.406: R61.1 88.22,6.91 R62.1
  Top 0.508: IC1.3 87.25,9.61 R61.1
N$9
  Top 0.508: 21.84,51.31 R5.2 | 21.84,51.31 R7.1 | C17.1 21.84,51.31
N$10
  Top 0.254: R30.1 95.29,49.4 95.29,47.6 U7.3
N$11
  Top 0.254: 15.37,37.14 Q6.2 | Q6.2 Q5.1 | Q6.2 15.75,37.14 | 18.33,40.19 R14.1
  Top 0.508: SL3.1 6.82,39.33 8,40.51 11.24,40.51 R10.1 15.75,40.19 | 15.75,40.19 18.33,40.19 | 15.75,37.14 15.75,40.19
N$13
  Top 0.254: 8.76,32.27 8.77,32.32 R11.2 | Q5.2 Q6.1 15.75,35.24 | 18.33,32.32 R15.2 | 15.75,32.89 15.75,32.32
  Top 0.508: SL3.2 6.69,34.33 8.76,32.27 | 15.75,35.24 15.75,32.89 | R11.2 15.75,32.32 18.33,32.32
N$14
  Top 0.254: 21.84,56.01 C16.2
  Top 0.508: 21.84,55.75 R22.1 | 21.84,55.75 R36.1 | C16.2 21.84,55.75
N$15
  Top 0.508: L2.1 9.74,27.94 9.14,28.54 SL5.2
N$17
  Top 0.508: 21.72,32 R15.1 | 21.72,32 R17.1 | C22.2 21.72,32
N$18
  Top 0.254: C21.1 21.97,39.3
  Top 0.508: 21.97,40.51 R14.2 | 21.97,40.51 R16.1 | 21.97,39.3 21.97,40.51
N$27
  Top 0.254: R44.1 LED1.A
N$28
  Top 0.254: R45.1 LED6.A
N$30
  Top 0.254: U2.14 57.24,11.07 53.41,7.24 45.09,7.24 45.09,13.74 46.55,15.21 U3.8
N$31
  Top 0.254: U2.13 57.63,12.34 53.05,7.77 45.85,7.77 45.85,13.13 48.71,13.13 U3.11
N$35
  Top 0.254: 14.01,19.05 R12.1
  Top 0.508: L1.2 14.01,19.05
N$36
  Top 0.254: 16.64,23.66 R13.1
  Top 0.508: R12.2 16.64,23.66
N$37
  Top 0.508: R13.2 23.92,24.13 R9.1
N$38
  Top 0.254: 27.1,19.26 R18.1
  Top 0.508: R9.2 27.1,19.26
N$39
  Top 0.406: S2.A2 73.52,55.61 D2.C
N$40
  Top 0.254: 11.36,56.01 R2.2 | Q1.2 Q2.1 15.87,58.99 | 18.45,56.07 R22.2
  Top 0.508: SL1.2 6.44,57.44 7.87,56.01 11.36,56.01 | 15.87,56.07 R2.2 | 15.87,56.07 18.45,56.07 | 15.87,58.99 15.87,56.07
N$41
  Top 0.254: 21.84,63.63 C15.1
  Top 0.508: 21.84,64.01 R21.2 | 21.84,64.01 R35.1 | C15.1 21.84,64.01
N$44
  Top 0.254: U3.3 55.5,12.61 56.36,13.46 58.9,13.46 U2.12
N$49
  Top 0.254: U2.11 58.82,14.81 55.88,14.81 55.63,14.56 U3.6
N$50
  Top 0.254: R50.1 LED5.A
N$57  (via drill 0.38)
  Top 0.254: U6.2 73.1,6.48 | v71.76,10.03 71.76,9.91
  Top 0.406: v72.77,14.73 72.67,14.63 72.27,14.63 68.71,11.07 U2.3 | 71.76,9.91 72.26,9.4 72.26,6.68 72.54,6.41 U6.2
  Bottom 0.406: v72.77,14.73 72.01,13.97 72.01,10.29 v71.76,10.03
N$58  (via drill 0.38)
  Top 0.254: U6.5 73.06,4.57
  Top 0.406: v72.9,16 72.16,15.26 71.89,15.26 68.97,12.34 U2.4 | v70.48,6.86 71.37,6.86 71.37,5.75 72.67,4.46 U6.5
  Bottom 0.254: v72.9,16 72.77,16
  Bottom 0.406: 72.77,16 70.54,13.77 v70.48,6.86
N$59  (via drill 0.38)
  Top 0.254: U6.9
  Top 0.406: v74.17,17.27 73.69,16.79 71.89,16.79 68.71,13.61 U2.5 | v76.33,6.99 76.33,4.06 76.58,3.81 U6.9
  Bottom 0.254: 76.33,7.37 v76.33,6.99
  Bottom 0.406: v74.17,17.27 73.66,16.76 73.66,10.03 76.33,7.37
N$60  (via drill 0.38)
  Top 0.254: 79.03,5.71 U6.12
  Top 0.406: v75.06,18.8 74.32,18.06 72.02,18.06 68.84,14.88 U2.6 | v77.72,6.99 77.72,5.97 77.98,5.71 79.03,5.71
  Bottom 0.254: 75.82,8.89 v77.72,6.99
  Bottom 0.406: v75.06,18.8 75.82,18.03 75.82,8.89
N$67
  Top 0.508: L1.1 4.6,23.54 SL5.1
N$76
  Top 0.254: IC1.1 84.71,9.87 83.95,9.1 R58.1
  Top 0.406: R57.1 R58.1
PM1_ADE  (via drill 0.38)
  Top 0.254: U1.5 44.7,44.7 45.68,44.7 R48.2 47.59,44.87 v47.62,44.83 | v50.55,44.83 53.09,44.83 56.77,41.15 56.77,36.96 57.53,36.2 U5.14
  Bottom 0.254: v47.62,44.83 v50.55,44.83
PM1_ISO
  Top 0.254: U5.7 76.45,36.2 77.09,35.56 77.09,30.1 77.6,29.59 78.32,29.59 R69.1
  Top 0.406: U7.26 82.48,29.68 80.99,28.19 R69.1
REF
  Top 0.254: U1.16 41.35,30.48 38.1,30.48 37.43,31.15 C45.2 C41.2
RESET_ADE  (via drill 0.38)
  Top 0.254: U1.6 44.2,47.51 C39.1 | v47.88,47.75 47.37,47.75
  Top 0.406: C39.1 R43.2 46.61,48.51 47.37,47.75 | U5.13 57.91,37.46 57.66,37.72 57.66,42.29 v52.96,46.99
  Bottom 0.406: v52.96,46.99 48.64,46.99 v47.88,47.75
RESET_ARD
  Top 0.254: 70.51,55.5 D1.C
RESET_ESP
  Top 0.254: R59.1 85.01,49.91 86.29,48.63 U7.10
RESET_ISO
  Top 0.254: U5.8 69.29,37.46 69.67,37.85 69.67,40 R53.2 | D2.A 72.52,52.98
  Top 0.406: R53.2 70.65,40 69.51,41.15 69.51,42.67 70.36,43.52 C56.2 70.87,51.33 D2.A | 72.52,52.98 D1.A
SCL_ARDUINO
  Top 0.254: 95.76,28.19 95.8,28.16 R55.1 95.8,25.55 89.28,19.04 89.28,14.73 89.15,14.6 87.88,14.6 87.25,15.24 IC1.6
  Top 0.406: 95.76,28.19 95.76,28.45 95.18,29.03 U7.36 | IC1.6 87.25,17.65
SCLK_ADE
  Top 0.254: U5.18 57.3,31.12 57.06,31.36 U1.37
SCLK_ISO
  Top 0.406: U5.3 72.47,31.12 77.29,26.29 85.15,26.29 87.56,28.69 U7.30
SDA_ARDUINO
  Top 0.254: U7.33 91.35,30.47 91.35,28.63 R52.1 91.69,28.28 91.69,22.1 88.52,18.92 IC1.5
SS_ADE
  Top 0.254: U5.15 57.66,34.92 55.88,36.7 55.88,38.99 55.24,39.62 52.58,39.62 52.45,39.75 | U1.40 47.42,33.2 47.62,33.4 47.75,33.4 49.78,35.43 49.78,39.37 50.16,39.75 52.45,39.75 | 52.45,39.75 52.54,39.84 R54.1
SS_ISO
  Top 0.254: R56.1 85.05,28.07 | 86.31,30.52 U7.29 86.29,28.37 85.98,28.07 R56.1 | R56.1 84.92,28.07 | R56.1 84.61,28.07 83.48,26.93 77.51,26.93 76.58,27.86 76.58,34.42 76.07,34.92 74.68,34.92
  Top 0.406: U5.6 74.68,34.92
V+  (via drill 0.38, 0.61)  (1 unrouted)
  Top 0.254: 80.81,8 C53.1 | 73.12,23.31 C14.1 | 74.91,22.38 74.87,22.42 | 74.91,22.5 74.93,22.48 | C56.1 72.48,41.82 | C58.1 81.19,49.53 82.72,49.53 R59.2 84.84,51.65 R28.2 | 89.87,28.23 R52.2 89.95,25.11 90.3,24.77 90.3,23.05 84.71,17.46 | R56.2 82.8,27.77 v81.86,27.77 | 72.48,41.82 R53.1 | C1.1 R55.2 97.5,25.66 C7.1 90.62,18.67 90.62,14.96 89.76,14.1 85.73,14.1 84.68,15.14 84.68,16.54 | C57.1 72.48,43.59 72.48,41.82 | R27.2 91.91,51.43 95.5,51.43 96.35,50.59 R30.2
  Top 0.508: C58.1 81.13,49.6 79.25,49.6 C57.1 | C3.1 70.98,28.32 | 70.1,28.58 U5.1 | 70.1,28.58 70.63,28.58 C3.1 | v72.64,28.32 70.36,28.32 70.1,28.58 | v82.55,8.13 80.94,8.13 C53.1 79.21,8.09 78.99,7.87 78.99,7.13 U6.14 | v71.76,37.59 71.76,39.5 71.75,39.51 R53.1 | 84.71,17.46 IC1.8 84.71,16.57 84.68,16.54 82.55,14.41 v82.55,8.13 | R62.2 88.01,3.81 83.95,3.81 | R58.2 83.95,3.81 | v82.55,8.13 82.55,4.57 83.31,3.81 83.95,3.81 | 73.12,23.31 U8.5 74.91,22.5 | v96.77,44.83 96.45,45.16 U7.2 96.45,49.95 R30.2 | v76.07,22.35 76.05,22.38 74.91,22.38 | C3.1 68.96,26.63 68.96,23.5 70.23,23.5 70.29,23.43 70.87,23.43 C13.1 70.97,23.41 C14.1 | 74.91,22.45 74.87,22.42
  Bottom 0.254: v81.86,27.77 88.18,27.77 88.33,27.62
  Bottom 0.508: v72.64,28.32 72.85,29.01 | 72.85,22.03 | 72.85,22.03 72.85,29.01 | 72.85,29.01 72.85,37.33 72.59,37.59 v71.76,37.59 | v82.55,8.13 80.86,9.82 77.04,9.82 76.49,10.37 76.49,18.39 72.85,22.03 | v96.77,44.83 96.77,44.62 93.5,41.22 93.41,32.7 88.33,27.62 83.06,22.35 v76.07,22.35
VAN
  Top 0.254: 36.22,26.5 36.2,26.47 R33.1 34.04,27.59 C27.1 | U1.19 41.45,28.83 40.13,28.83 38.1,26.8 37.21,26.8 36.83,26.42 36.83,25.92 C52.1 36.22,26.5 | 36.22,26.5
VAP
  Top 0.254: U1.20 41.44,28.32 40.51,28.32 38.75,26.56 | R18.2 31.37,19.73 | 38.23,25.8 C52.2 37.97,25.77 | 33.82,22.14 33.82,22.94 R29.2 | 31.75,22.52 C23.1 31.41,22.42
  Top 0.305: C52.2 38.75,26.56 | 33.82,22.14 36.58,24.89 37.85,24.89 37.97,25.02 37.97,25.77
  Top 0.508: R29.2 31.75,22.52 | 31.41,22.42 R18.2
VCC  (via drill 0.38, 0.61)  (1 unrouted)
  Top 0.254: 79.4,23.31 C10.1 | v95.38,20.32 95.63,20.07 C62.2 | C62.2 95.79,18.5 C63.2 98.43,18.5 99.86,19.93 100.2,19.93 | C62.2 93.79,18.35 92.96,17.53 v92.96,14.22
  Top 0.508: U2.1 68.71,8.53 71.65,11.47 C49.1 74.55,11.47 C48.1 75.69,11.22 77.43,12.95 v77.98,12.95 77.98,16.64 77.09,17.53 77.09,19.3 76.07,20.32 74.3,20.32 73.34,19.37 C6.1 71.93,19.37 68.71,16.15 U2.7 | v92.96,14.22 92.9,14.16 | v81.53,20.96 81.28,21.21 81.28,23.37 | C9.1 81.59,23.05 81.28,23.37 | U8.1 78.74,23.31 | 78.74,23.31 79.4,23.31 | C10.1 81.24,23.41 81.28,23.37 | 78.74,23.31 78.74,23.71 78.49,23.96 78.49,24.8 78.08,25.21 U8.3
  Bottom 0.508: v77.98,12.95 78.57,13.55 92.29,13.55 v92.96,14.22 | v81.53,20.96 81.92,20.57 95.12,20.57 v95.38,20.32
ZX_ADE
  Top 0.254: U1.35 49.14,30.36 50.16,29.34 52.83,29.34 54.99,27.18 54.99,20.32 52.83,18.16 52.83,12.32 53.14,12.01 54.54,12.01 54.59,11.96 U3.2

## Text on the board
tPlace: CAUTION! HIGH VOLTAGE | ADE9000_RESET | IA | IB | SS_ADE | MISO_ADE | IC | MOSI_ADE | SCLK_ADE | NEUTRAL | ADE9000 ARDUINO SHIELD | REV A.0 | * | IRQ0 | IRQ1 | GND_LIVE
bPlace: SCLK_ISO | SS_ISO
DrillLegend: DRILL LEGEND
FabDoc1: LAYER STACKUP: / --TOP SILKSCREEN / --TOP SOLDERMASK / --TOP LAYER / --BOTTOM LAYER / --BOTTOM SOLDERMASK / --BOTTOM SILKSCREEN / / NOMINAL FINISHED BOARD THICKNESS: 0.062" | PCB SPECIFICATIONS: / --SOLDERMASK: GREEN / --SILKSCREEN: WHITE / --MATERIAL: STANDARD FR4 / --SURFACE FINISH: ENIG / --FINISHED COPPER: 1 Oz